# Altium PCB MEGA PROJECT CONTROL BOARD PCB.PcbDoc
Units mm, origin at the board's own origin, x right, y up, seen from the top; angles counter-clockwise.
Board outline 75.8 x 65 mm, 2 copper layers (Top Layer, Bottom Layer); 16 components, 22 nets, 104 pads, 13 vias.
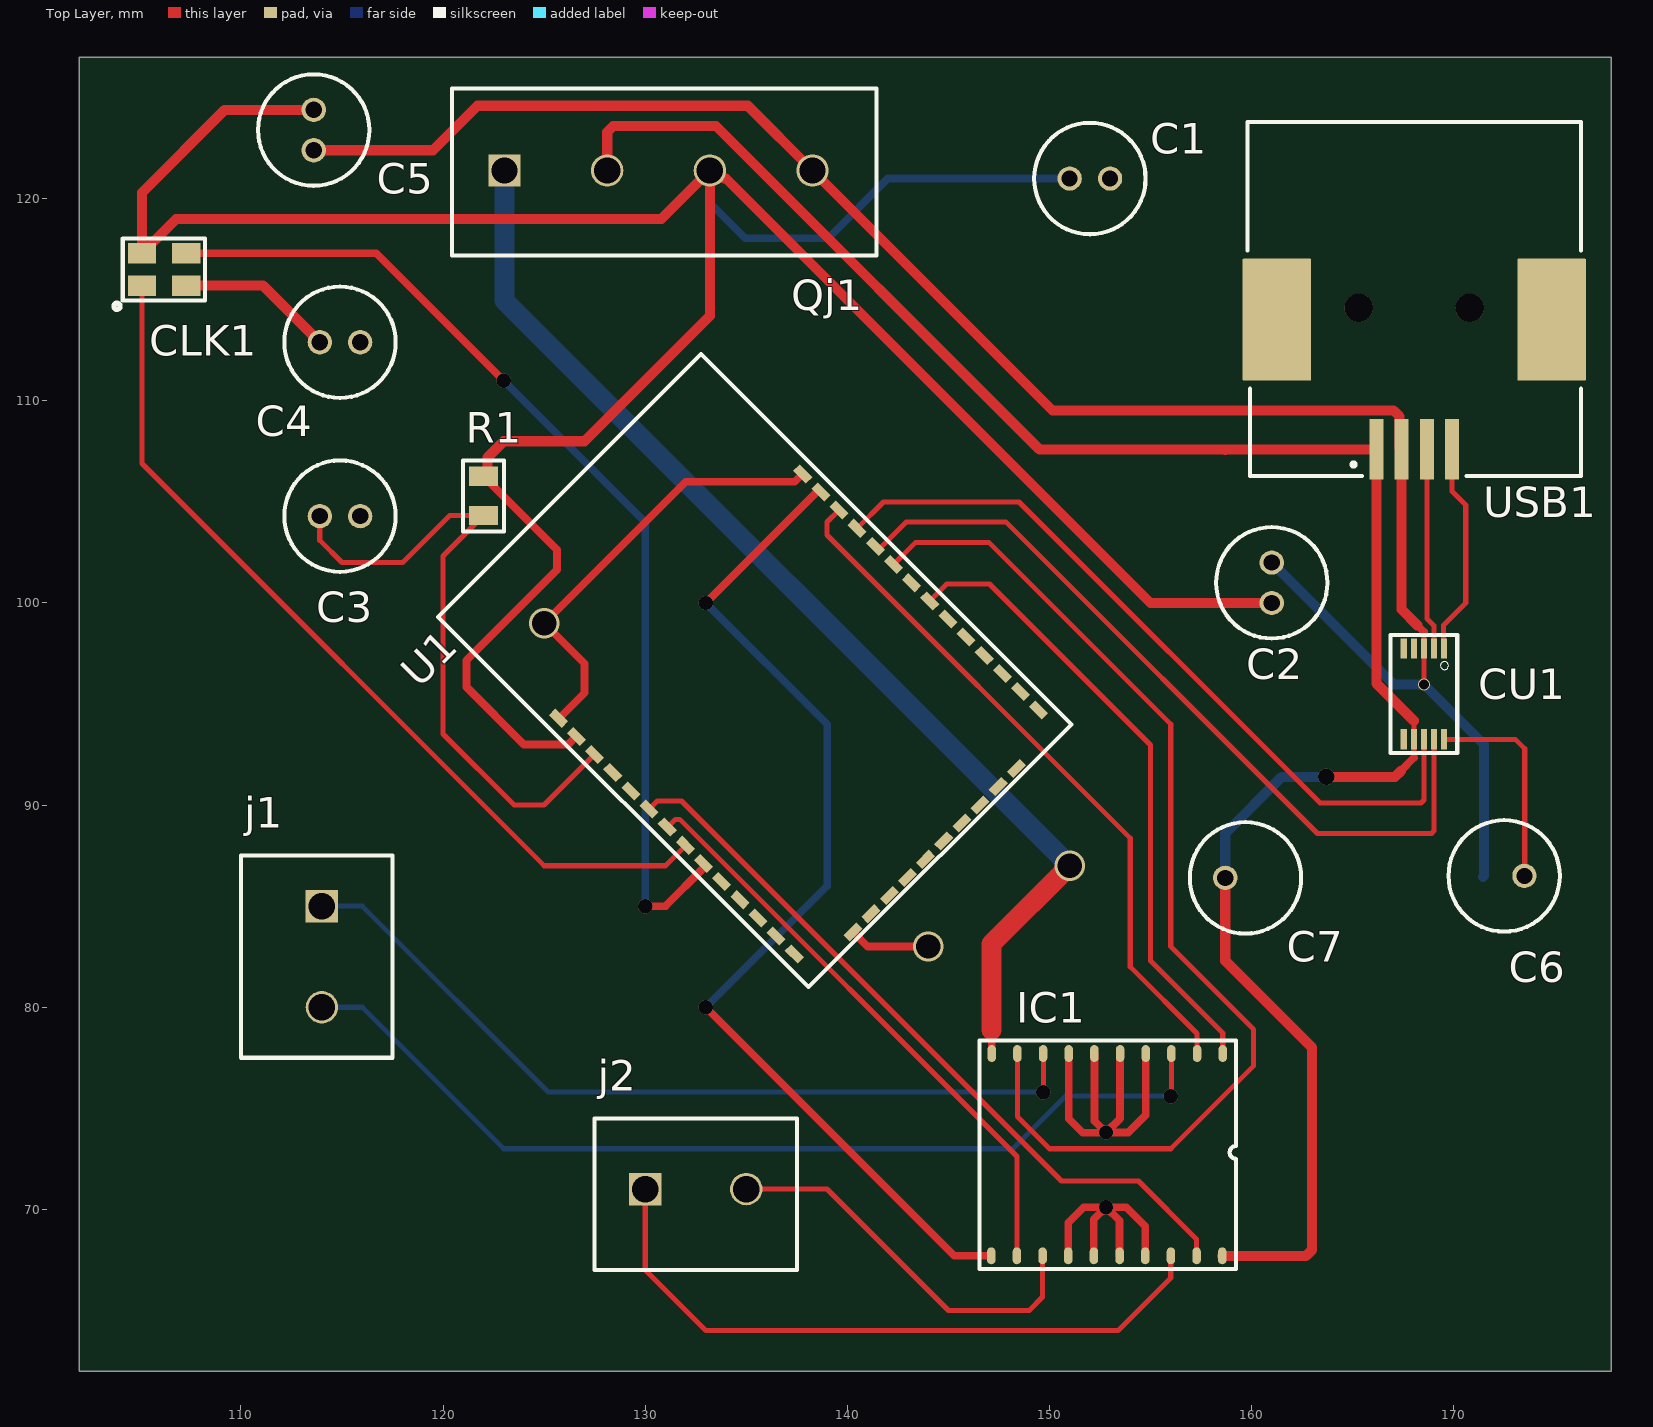
[diagram p0: Top Layer view]
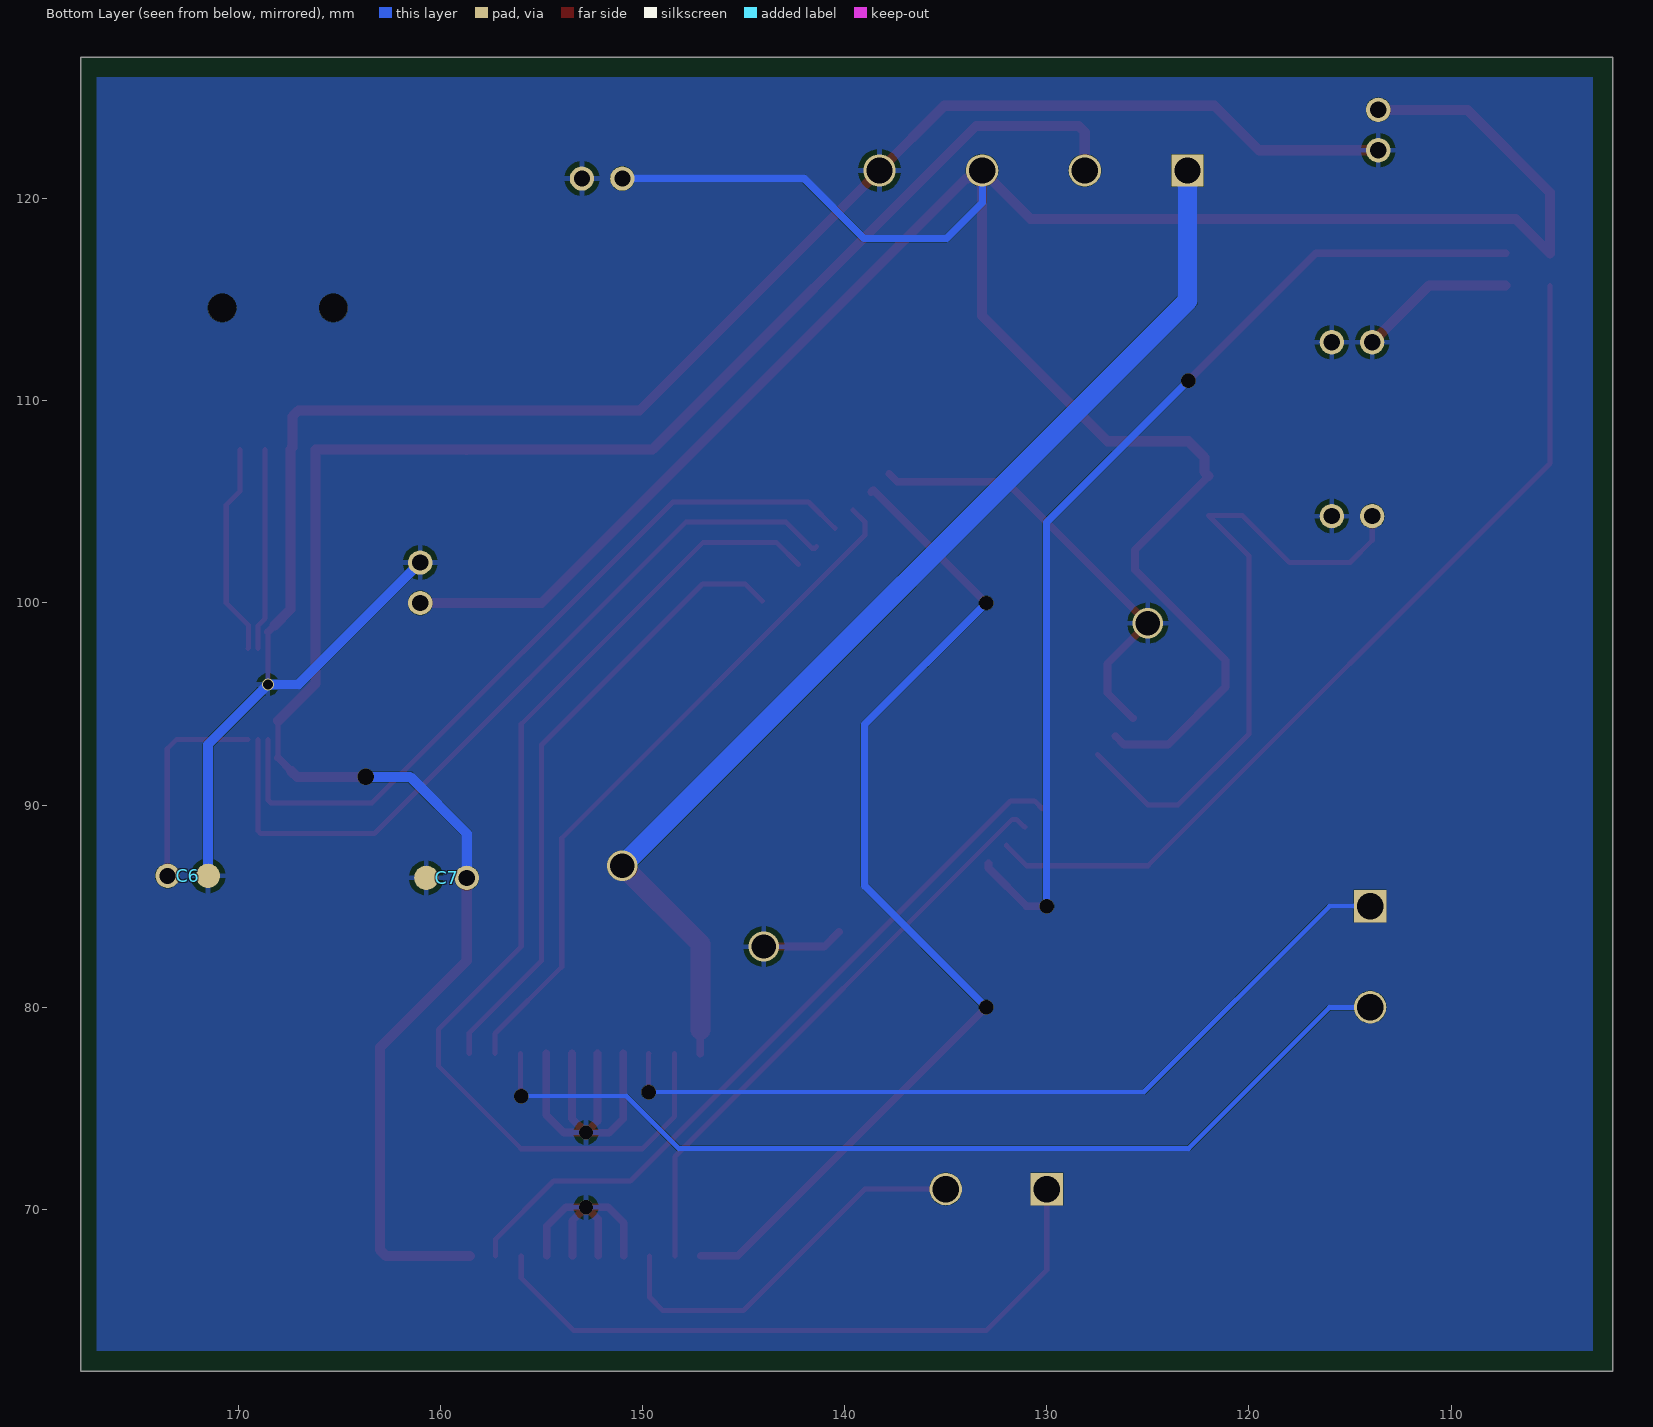
[diagram p1: Bottom Layer view, seen from below]
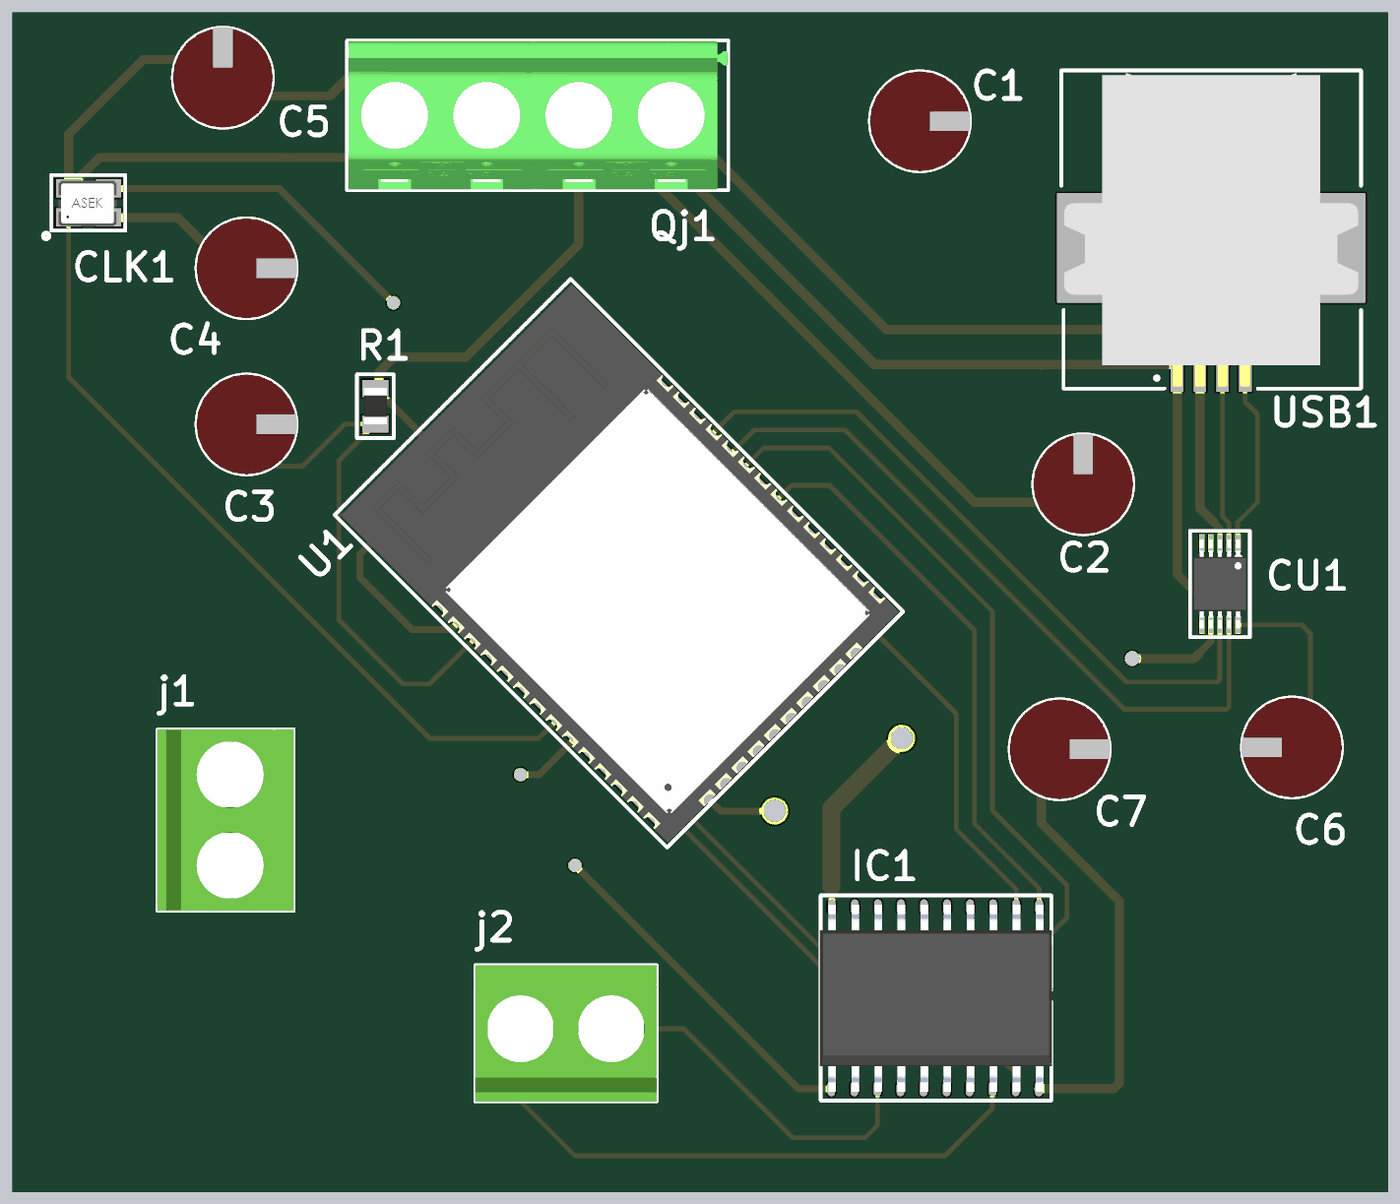
[diagram p2: 3D render of the assembled board from above, using the file's embedded part models]

## Layer stack, top to bottom
Top Solder: solder mask 0.0102, Solder Resist, Dk 3.5
Top Layer: signal copper 0.0356
Dielectric 1: dielectric 0.32, FR-4, Dk 4.8
Bottom Layer: signal copper 0.0356
Bottom Solder: solder mask 0.0102, Solder Resist, Dk 3.5

## Board outline
102,62 177.8,62 177.8,127 102,127

## Design rules (kind name [scope] priority, off if disabled: settings)
Clearance [All] p1: gap=0.003 ignorepadtopadclearanceinfootprint=FALSE
MinimumSolderMaskSliver [All] p1: minsoldermaskwidth=0.1
PolygonConnect [All] p1: connectstyle=Relief reliefconductorwidth=0.254 reliefentries=4 polygonreliefangle="90 Angle" airgapwidth=0.254
RoutingTopology [All] p1: topology=Daisy_MidDriven
RoutingVias [All] p1: holewidth=1 width=1.2 viastyle="Through Hole" minholewidth=0.5 minwidth=0.6 maxholewidth=2 maxwidth=2.5
SilkToSilkClearance [All] p1: silktosilkclearance=0.05
SilkToSolderMaskClearance [IsPad] p1: minsilkscreentomaskgap=0.05 clearancetoexposedcopper=TRUE
SolderMaskExpansion [All] p1: expansion=0.102 istentingtop=FALSE
SupplyNets "Schematic Supply Nets_1" [InNet('+5')] p1: voltage=0.000
SupplyNets "Schematic Supply Nets" [InNet('GND')] p2: voltage=0.000
Width [All] p1: maxlimit=1 minlimit=0.2 preferedwidth=0.381 minimp=50.000000 maximp=50.000000 favimp=50.000000
26 further rules are at their usual default settings.

## Components (designator, comment, footprint, x,y, rotation, side; value= is the part's Value field where it differs from the comment)
C1 "1uf" Capacitor#1 152,121 r0 top
C2 "1uf" Capacitor#1 161,101 r90 top
C3 "1uf" Capacitor#1 114.9,104.297 r0 top
C4 "1uf" Capacitor#1 114.9,112.9 r0 top
C5 "1uf" Capacitor#1 113.6,123.4 r90 top
C6 "1uf" Capacitor#2 172.5,86.5 r180 top
C7 "1uf" Capacitor#2 159.7,86.4 r0 top
CLK1 "crystal clock" "Crystal Oscillator" 104.639,117.627 r0 top
CU1 "CH340E" CH340E 168.529,95.504 r270 top
IC1 "L293DD" L293DD 158.601,76.768 r270 top
j1 "terminal" terminal 114,85 r270 top
j2 "terminal" terminal 130,71 r0 top
Qj1 "4_terminal" "4 position terminal block" 123.04,121.4 r0 top
R1 "360r" R0805 122,105.3 r90 top value=360R
U1 "ESP32" ESP32 125.702,94.298 r45 top
USB1 "USB B port" "USB B port" 168.05,111.1 r180 top

## Footprints (in the part's own frame and the unit in brackets; to place one, negate y for a bottom-side part, rotate by r counter-clockwise, add the part's x,y. Pads: shape width x height; smd on the part's side, far side on the other; paste and mask are expansions set on the pad)
"4 position terminal block" [mm]
  rect 1.6x1.6 hole 1.3: 1(0,0)
  round 1.6 hole 1.3: 2(5.08,0) 3(10.16,0) 4(15.24,0)
  silkscreen extent -2.6,-4.2 18.4,4.05, body extent -2.51,-4.15 18.37,4, height 9.97
Capacitor#1 [mm]
  round 1.2 hole 0.8: 1(-1,0) 2(1,0)
  silkscreen extent -2.76,-2.76 2.76,2.76, body extent -2.76,-2.75 2.79,2.75, height 12.51
Capacitor#2 [mm]
  round 1.2 hole 0.8: 1(-1,0)
  round 1.2 smd far side: 2(1,0)
  silkscreen extent -2.76,-2.76 2.76,2.76, body extent -2.76,-2.75 2.79,2.75, height 12.51
CH340E [mm]
  rect 1x0.3 smd paste-1 mask+0.05: 1(-2.25,1) 2(-2.25,0.5) 3(-2.25,0) 4(-2.25,-0.5) 5(-2.25,-1) 6(2.25,-1) 7(2.25,-0.5) 8(2.25,0) 9(2.25,0.5) 10(2.25,1)
  silkscreen extent -2.92,-1.65 2.92,1.65, body extent -2.45,-1.5 2.45,1.5, height 1
"Crystal Oscillator" [mm]
  rect 1.4x1 smd: 1(0.461,-1.927) 2(2.661,-1.927) 3(2.661,-0.327) 4(0.461,-0.327)
  silkscreen extent -0.93,-3.1 3.59,0.41, body extent -0.09,-2.4 3.11,0.1, height 1.2
ESP32 [mm]
  rect 0.45x0.9 smd: 1(0,0) 2(0,-1.27) 3(0,-2.54) 4(0,-3.81) 5(0,-5.08) 6(0,-6.35) 7(0,-7.62) 8(0,-8.89) 9(0,-10.16) 10(0,-11.43) 11(0,-12.7) 12(0,-13.97) 13(0,-15.24) 14(0,-16.51) 25(17.1,-16.51) 26(17.1,-15.24) 27(17.1,-13.97) 28(17.1,-12.7) 29(17.1,-11.43) 30(17.1,-10.16) 31(17.1,-8.89) 32(17.1,-7.62) 33(17.1,-6.35) 34(17.1,-5.08) 35(17.1,-3.81) 36(17.1,-2.54) 37(17.1,-1.27) 38(17.1,0)
  rect 0.9x0.45 smd: 15(2.835,-17.785) 16(4.105,-17.785) 17(5.375,-17.785) 18(6.645,-17.785) 19(7.915,-17.785) 20(9.185,-17.785) 21(10.455,-17.785) 22(11.725,-17.785) 23(12.995,-17.785) 24(14.265,-17.785)
  silkscreen extent -0.66,-18.16 17.73,7.75, body extent -0.44,-18.01 17.56,7.49, height 3.25
L293DD [mm]
  oval 0.835x0.42 smd: 1(-0.94,-0.025) 2(-0.94,-1.295) 3(-0.94,-2.565) 4(-0.94,-3.835) 5(-0.94,-5.105) 6(-0.94,-6.375) 7(-0.94,-7.645) 8(-0.94,-8.915) 9(-0.94,-10.185) 10(-0.94,-11.455) 11(9.068,-11.481) 12(9.068,-10.211) 13(9.068,-8.941) 14(9.068,-7.671) 15(9.068,-6.401) 16(9.068,-5.131) 17(9.068,-3.861) 18(9.068,-2.591) 19(9.068,-1.321) 20(9.068,-0.051)
  silkscreen extent -1.58,-12.06 9.73,0.64, body extent -1.07,-12.11 9.25,0.68, height 2.65
R0805 [mm]
  rect 0.95x1.45 smd: 1(-0.975,0) 2(0.975,0)
  silkscreen extent -1.75,-1.02 1.75,1.02, body extent -1,-0.63 1,0.63, height 0.6
terminal [mm]
  rect 1.6x1.6 hole 1.3: 1(0,0)
  round 1.6 hole 1.3: 2(5,0)
  silkscreen extent -2.5,-4 7.5,3.5, body extent -2.5,-4 7.5,3.5, height 11.5
"USB B port" [mm]
  rrect4% 0.7x3 smd: 1(1.875,3.5) 2(-0.625,3.5) 3(-1.875,3.5) 4(0.625,3.5)
  rrect4% 3.4x6.04 smd: S1(-6.8,-2.92) S2(6.8,-2.92)
  round 1.4 hole 1.4 unplated: ""(-2.75,-3.5) ""(2.75,-3.5)
  silkscreen extent -8.25,-12.7 8.26,4.83, body extent -8.1,-12.54 8.1,4.7, height 10.78

## Part data
C1 C2 C3 C4 C5 C6 C7: library part capacitor, "Aluminum Electrolytic Capacitor, Aluminum (wet)", Capacitor Type=Aluminium, Manufacturer="Wurth Electronics", Manufacturer Part Number=860020672005, Supplier Part Number=732-8851-1-ND, Category="Aluminum Electrolytic Capacitors", ComponentLink1Description=https://datasheet.ciiva.com:443/pdfs/VipMasterIC/IC/MIDC/MIDC-S-A0000764616/MIDC-S-A0000764162-1.pdf?src-supplier=IHS+Markit, ComponentLink1URL=https://datasheet.ciiva.com:443/pdfs/VipMasterIC/IC/MIDC/MIDC-S-A0000764616/MIDC-S-A0000764162-1.pdf?src-supplier=IHS+Markit, ComponentLink2Description=http://www.farnell.com/datasheets/1879647.pdf?src-supplier=Farnell, ComponentLink2URL=http://www.farnell.com/datasheets/1879647.pdf?src-supplier=Farnell, ComponentLink3Description=http://katalog.we-online.de/pbs/datasheet/860020672005.pdf?src-supplier=Digikey, ComponentLink3URL=http://katalog.we-online.de/pbs/datasheet/860020672005.pdf?src-supplier=Digikey, ComponentLink4Description=https://katalog.we-online.de/pbs/datasheet/860020672005.pdf?src-supplier=Digikey, ComponentLink4URL=https://katalog.we-online.de/pbs/datasheet/860020672005.pdf?src-supplier=Digikey, ComponentLink5Description=http://www.farnell.com/datasheets/1879647.pdf?src-supplier=Element14, ComponentLink5URL=http://www.farnell.com/datasheets/1879647.pdf?src-supplier=Element14, Dielectric Material=Aluminium, Pins=2, Pricing="1=0.1, 50=0.089, 100=0.078, 250=0.069, 500=0.06, 1000=0.058 (USD)", Reach SVHC Compliant=Yes, RoHS=Yes, RoHS Compliant=Yes, Stock=10459, Supplier=Digikey
CLK1: library part "Crystal oscillator", "Oscillator XO 0.032768MHz ±25ppm 15pF 60% 3.3V 4-Pin SMD T/R", Manufacturer=Abracon, Manufacturer Part Number=ASEK-32.768KHZ-L-R-T, Supplier Part Number=815-ASEK-32.7K-LRT, Pricing="1=1.33, 10=1.04, 50=1.04, 100=0.986, 1000=0.787, 10000=0.696 (USD)", RoHS=No, Stock=5543, Supplier=Mouser
j1 j2: "Barrier Strip Terminal Block", Manufacturer="Wurth Electronics", Manufacturer Part Number=691137710002, Supplier Part Number=1769908, Category="Terminal Blocks", ComponentLink1Description=https://datasheet.ciiva.com:443/pdfs/VipMasterIC/IC/MIDC/MIDC-S-A0005074262/MIDC-S-A0004711666-1.pdf?src-supplier=IHS+Markit, ComponentLink1URL=https://datasheet.ciiva.com:443/pdfs/VipMasterIC/IC/MIDC/MIDC-S-A0005074262/MIDC-S-A0004711666-1.pdf?src-supplier=IHS+Markit, ComponentLink2Description=https://katalog.we-online.de/em/datasheet/691137710002.pdf?src-supplier=Digikey, ComponentLink2URL=https://katalog.we-online.de/em/datasheet/691137710002.pdf?src-supplier=Digikey, Pricing="500=0.218, 1000=0.202, 2500=0.189 (GBP)", RoHS=No, RoHS Compliant=Yes, Stock=355, Supplier=Rs
Qj1: library part "quad terminal", "Barrier Strip Terminal Block, 12A, 1.5mm2, 1 Row(s), 1 Deck(s)", Current Rating=12A, Manufacturer="Phoenix Contact", Manufacturer Part Number=1934887, Supplier Part Number=4680931, Voltage Rating=250V, Category="Terminal Blocks", ComponentLink1Description=https://www.phoenixcontact.com:443/online/portal/us?uri=pxc-oc-itemdetail%3apid%3d1934887&library=usen&pcck=P-11-02-11&tab=1&src-supplier=IHS+Markit, ComponentLink1URL=https://www.phoenixcontact.com:443/online/portal/us?uri=pxc-oc-itemdetail%3apid%3d1934887&library=usen&pcck=P-11-02-11&tab=1&src-supplier=IHS+Markit, ComponentLink2Description=https://datasheet.ciiva.com/16047/1934887-16047240.pdf?src-supplier=Onlinecomponents.com, ComponentLink2URL=https://datasheet.ciiva.com/16047/1934887-16047240.pdf?src-supplier=Onlinecomponents.com, ComponentLink3Description=https://datasheet.ciiva.com/15169/getdatasheetpartid-177849-15169637.pdf?src-supplier=Verical, ComponentLink3URL=https://datasheet.ciiva.com/15169/getdatasheetpartid-177849-15169637.pdf?src-supplier=Verical, ComponentLink4Description=https://datasheet.ciiva.com/795/combiconcompact5-0mmseries-795415.pdf?src-supplier=Digikey, ComponentLink4URL=https://datasheet.ciiva.com/795/combiconcompact5-0mmseries-795415.pdf?src-supplier=Digikey, ComponentLink5Description=https://datasheet.ciiva.com/14608/70054929-14608235.pdf?src-supplier=Allied+Electronics, ComponentLink5URL=https://datasheet.ciiva.com/14608/70054929-14608235.pdf?src-supplier=Allied+Electronics, ComponentLink6Description=https://datasheet.ciiva.com/29224/744154-da-01-en-printklemme-pt-1-5-4-pvh-5-0-29224875.pdf?src-supplier=Conrad, ComponentLink6URL=https://datasheet.ciiva.com/29224/744154-da-01-en-printklemme-pt-1-5-4-pvh-5-0-29224875.pdf?src-supplier=Conrad, Fastening Method=SCREW, Mounting Technology=Board, Number of Decks=1, Number of Rows=1, Number of Ways=4, Pricing="5=1.204, 125=1.172, 375=1.14, 1000=1.108, 2000=1.08 (GBP)", Reach SVHC Compliant=Yes, RoHS=Yes, RoHS Compliant=Yes, Safety Approval=UL, Stock=125, Supplier=Rs, Terminal and Terminal Block Type="BARRIER STRIP TERMINAL BLOCK", Wire Cross Section=1.5mm2, Wire/Cable Gauge=14AWG
R1: library part resistor, "Fixed Resistor, Metal Glaze/thick Film, 0.125W, 360ohm, 150V, 1% +/-Tol, 100ppm/Cel, Surface Mount, 0805", Case/Package=0805, Manufacturer=Vishay, Manufacturer Part Number=CRCW0805360RFKEA, Max Operating Temperature=155°C, Min Operating Temperature=-55°C, Package Height=0.45mm, Package Length=2mm, Package Shape=Rectangular, Package Style=SMTMeter, Package Width=1.25mm, Power=125mW, Rated Temperature=70°C, Resistor Type="FIXED RESISTOR", Supplier Part Number=71-CRCW0805360RFKEA, Temperature Coefficient=100ppm/°C, Tolerance=1%, Working Voltage=150V, Category="Chip SMD Resistors", ComponentLink1Description=https://datasheet.ciiva.com:443/pdfs/VipMasterIC/IC/VISH/VISH-S-A0007266705/VISH-S-A0007266705-1.pdf?src-supplier=IHS+Markit, ComponentLink1URL=https://datasheet.ciiva.com:443/pdfs/VipMasterIC/IC/VISH/VISH-S-A0007266705/VISH-S-A0007266705-1.pdf?src-supplier=IHS+Markit, ComponentLink2Description=https://datasheet.ciiva.com/2467/dcrcwe3-2467773.pdf?src-supplier=Digikey, ComponentLink2URL=https://datasheet.ciiva.com/2467/dcrcwe3-2467773.pdf?src-supplier=Digikey, Construction=Chip, JESD-609 Code=e3, Mounting Technology="Surface Mount", Packaging="Tape and Reel", Pins=2, Pricing="1=0.1, 10=0.025, 50=0.025, 100=0.015, 1000=0.012, 10000=0.008 (USD)", Reach SVHC Compliant=Yes, Reference Standard=AEC-Q200, RoHS=Yes, RoHS Compliant=Yes, Stock=921, Supplier=Mouser, Technology="METAL GLAZE/THICK FILM", Terminal Finish=Nickel, Termination=Wraparound

## Via types
v1: diameter 0.711, hole 0.711, Top Layer to Bottom Layer, 7 vias
v2: diameter 1.5, hole 1.2, Top Layer to Bottom Layer, 2 vias
v3: diameter 1.5/1.5 (per signal layer), hole 1.2, Top Layer to Bottom Layer, 1 vias
v4: diameter 0.711/0.711 (per signal layer), hole 0.711, Top Layer to Bottom Layer, 1 vias
v5: diameter 0.8, hole 0.8, Top Layer to Bottom Layer, 1 vias
v6: diameter 0.6/0.6 (per signal layer), hole 0.5, Top Layer to Bottom Layer, 1 vias

## Nets (pads, with @x,y where several pads share a name; then routed paths per layer and width w, separated by ;. In a path a pad name is that pad's centre, name@x,y a point inside that pad or via, vN(x,y) a via of type N, cw(c..) or ccw(c..) an arc to the next point about the centre after c; other vN are vias at no path point)
+3.3: C1.1 C2.1 C5.2 CLK1.4 Qj1.3 R1.2 U1.2 | length 143.7
  Top Layer w0.381: R1.2 125.638,102.638 125.638,101.638 121.158,97.158 121.158,95.842 124,93 126.189,93 126.589,93.4 U1.2
  Top Layer w0.5: C5.2 109.2,124.4 105.1,120.3 CLK1.4 106.8,119 130.8,119 Qj1.3 ; R1.2 122.207,106.482 122.207,107.207 123,108 127,108 133.2,114.2 Qj1.3 ; C2.1 155,100 133.996,121.004 133.894,121.004 133.498,121.4 Qj1.3
  Bottom Layer w0.381: Qj1.3 133.2,119.8 134.954,118.046 139.054,118.046 142.008,121 C1.1
+5: C7.1 CU1.7 IC1.20 Qj1.2 USB1.1 | length 100.6
  Top Layer w0.254: CU1.7 168.029,94.171 ; 168.034,92.339 168.034,93.239 CU1.7@168.039,93.244
  Top Layer w0.381: 167.381,91.681 167.381,91.686 168.034,92.339
  Top Layer w0.5: Qj1.2 128.12,123.307 128.413,123.6 133.5,123.6 149.5,107.6 158.667,107.6 ; IC1.20 162.7,67.7 163,68 163,78 158.7,82.3 C7.1 ; 158.7,107.567 158.667,107.6 ; v5(163.7,91.4) 167.1,91.4 167.381,91.681 ; 168.029,94.171 166.175,96.025 USB1.1 158.667,107.6
  Bottom Layer w0.5: C7.1 158.7,88.6 161.5,91.4 v5(163.7,91.4)
+12: IC1.10 Qj1.1 | length 56.9
  Top Layer w0.381: 147.128,78.872 147.145,78.855 IC1.10
  Top Layer w1: 147.128,78.872 147.128,83.128 v2(151,87)
  Bottom Layer w1: Qj1.1 123.04,114.96 v2(151,87)
"ENABLE 1": IC1.1 U1.31 | length 31.3
  Top Layer w0.254: U1.31 144.914,100.938 147.038,100.938 155,92.976 155,82.3 158.575,78.724 IC1.1
"ENABLE 2": IC1.11 U1.37 | length 52.2
  Top Layer w0.381: v1(133,80) 145.3,67.7 IC1.11 ; v1(133,100) 138.567,105.567 138.616,105.567 U1.37
  Bottom Layer w0.381: v1(133,80) 139,86 139,94 v1(133,100)
GND: C1.2 C2.2 C3.2 C4.1 C4.2 C5.1 C6.2 C7.2 CLK1.2 CU1.3 IC1.4 IC1.5 IC1.6 IC1.7 IC1.14 IC1.15 IC1.16 IC1.17 Qj1.4 U1.1 U1.15 U1.38 USB1.4 | length 161.2
  Top Layer w0.254: 168.529,98.571 CU1.3 168.529,95.973 v6(168.536,95.966)
  Top Layer w0.381: U1.1@125.74,94.298 127,95.558 127,97 v3(125,99) 132,106 137.404,106 U1.38 ; U1.15 141.009,83 v2(144,83) ; IC1.14 150.93,69.33 151.7,70.1 v4(152.8,70.1) ; IC1.7 150.955,74.475 151.647,73.783 v1@152.783,73.783 ; IC1.15 152.2,69.5 v4(152.8,70.1) ; IC1.6 152.225,74.375 v1@152.767,73.833 ; IC1.16 153.47,69.43 v4(152.8,70.1) ; IC1.5 153.495,74.495 v1(152.8,73.8) 153.9,73.8 154.765,74.665 IC1.4 ; IC1.17 154.74,69.16 153.8,70.1 v4(152.8,70.1) ; 168.2,98.9 168.529,98.571
  Top Layer w0.5: CLK1.2 111.1,115.7 C4.1 ; C5.1 119.5,122.4 121.7,124.6 135.08,124.6 Qj1.4 150.152,109.528 167.032,109.528 167.325,109.235 167.325,107.7 USB1.4 167.425,99.675 168.2,98.9
  Bottom Layer w0.5: C2.2 167.034,95.966 v6(168.536,95.966) 171.5,93.002 C6.2 C6.2@171.448,86.448
"INPUT 1": IC1.2 U1.36 | length 34.7
  Top Layer w0.254: U1.36 139,104.004 139,103.361 154,88.361 154,82 157.305,78.695 IC1.2
"INPUT 2": IC1.9 U1.33 | length 53.7
  Top Layer w0.254: U1.33 143.384,103 147,103 156,94 156,83 160.105,78.895 160.105,77.105 156,73 150,73 148.415,74.585 IC1.9
"INPUT 3": IC1.12 U1.7 | length 29.3
  Top Layer w0.254: U1.7 131.15,88.969 131.169,88.969 131.495,89.295 131.705,89.295 148.39,72.61 IC1.12
"INPUT 4": IC1.19 U1.6 | length 37.1
  Top Layer w0.254: U1.6 130.208,89.808 130.6,90.2 131.8,90.2 150.6,71.4 154.4,71.4 157.28,68.52 IC1.19
NetC3_1: C3.1 R1.1 U1.3 | length 32.3
  Top Layer w0.254: C3.1 113.9,103.1 115,102 118,102 120.325,104.325 R1.1 120,102.325 120,93.523 123.523,90 124.996,90 U1.3
NetC6_1: C6.1 CU1.10 | length 10.5
  Top Layer w0.254: CU1.10 173.051,93.254 173.2,93.105 173.517,92.788 C6.1@173.517,86.517
NetCU1_1: CU1.1 USB1.3 | length 10.6
  Top Layer w0.254: CU1.1 169.5,97.783 169.5,98.9 170.6,100 170.6,104.847 169.925,105.522 USB1.3
NetCU1_2: CU1.2 USB1.2 | length 10
  Top Layer w0.254: USB1.2 168.675,99.225 169.029,98.871 CU1.2
NetIC1_3: IC1.3 j1.2 | length 48.1
  Top Layer w0.254: v1(156,75.6) 156.035,75.635 IC1.3
  Bottom Layer w0.254: j1.2 116,80 123,73 148.2,73 150.8,75.6 v1(156,75.6)
NetIC1_8: IC1.8 j1.1 | length 41.4
  Top Layer w0.254: IC1.8 149.7,77.694 v1(149.7,75.8)
  Bottom Layer w0.254: j1.1 116,85 125.2,75.8 v1(149.7,75.8)
NetIC1_13: IC1.13 j2.2 | length 19.5
  Top Layer w0.254: j2.2 139,71 145,65 149,65 149.66,65.66 IC1.13
NetIC1_18: IC1.18 j2.1 | length 33.4
  Top Layer w0.254: j2.1 130,67 133,64 153.4,64 156,66.6 156,67.69 IC1.18
Output: CLK1.3 U1.9 | length 51.1
  Top Layer w0.381: CLK1.3 116.7,117.3 v1(123,111) ; v1(130,85) 131,85 132.886,86.886 U1.9
  Bottom Layer w0.381: v1(123,111) 130,104 v1(130,85)
RXD: CU1.8 U1.35 | length 37.8
  Top Layer w0.254: U1.35 141.792,105 148.5,105 163.4,90.1 168.38,90.1 168.529,90.249 CU1.8
Tri-state: CLK1.1 U1.8 | length 44.4
  Top Layer w0.254: CLK1.1 105.1,106.9 125,87 131,87 131.988,87.988 U1.8
TXD: CU1.9 U1.34 | length 39.2
  Top Layer w0.254: U1.34 141.475,102.708 141.614,102.708 142.907,104 147.859,104 163.259,88.6 168.9,88.6 169.029,88.729 CU1.9
pads on no net: CU1.4 CU1.5 CU1.6 U1.4 U1.5 U1.10 U1.11 U1.12 U1.13 U1.14 U1.16 U1.17 U1.18 U1.19 U1.20 U1.21 U1.22 U1.23 U1.24 U1.25 U1.26 U1.27 U1.28 U1.29 U1.30 U1.32 USB1. USB1.S1 USB1.S2

## Polygon pours and split planes (outlines as drawn)
GND on Bottom Layer "NONET_L-01_P-001" (solid, remove dead copper, pour order 0): 103,126 177,126 177,63 103,63

## Text inside footprints (layer, text, board x,y; h text height)
USB1: Mechanical 13 "PCB EDGE" at 171.55,123.1 h1.02 r180